# Altium PCB novena_battery_evt1a.PcbDoc (part 1 of 3)
Units mil, origin at the board's own origin, x right, y up, seen from the top; angles counter-clockwise.
Board outline 4763.78 x 1614.17 mil, 4 copper layers (Top Layer, Internal Plane 1, Internal Plane 2, Bottom Layer), stack 65.8 mil thick; 204 components, 130 nets, 1424 pads, 318 vias.
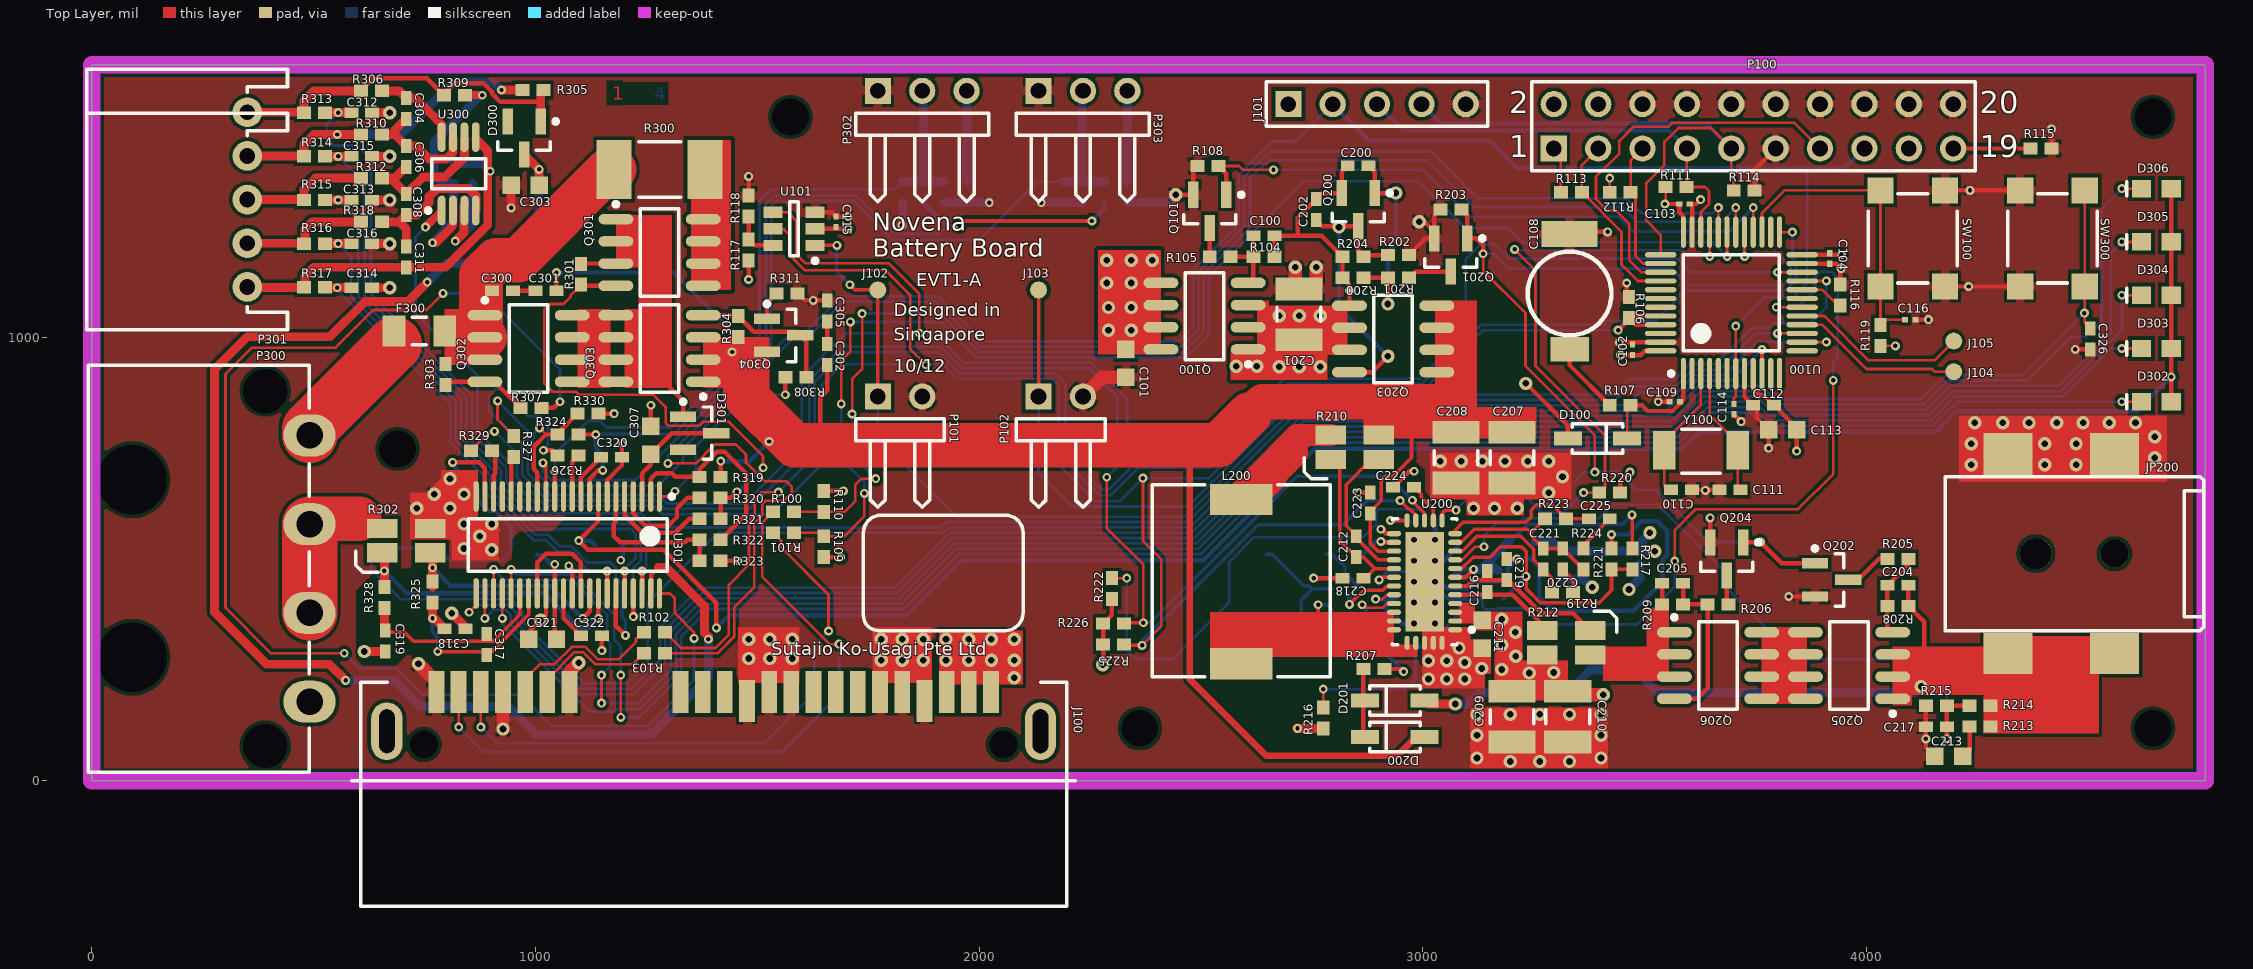
[diagram p0: Top Layer view]
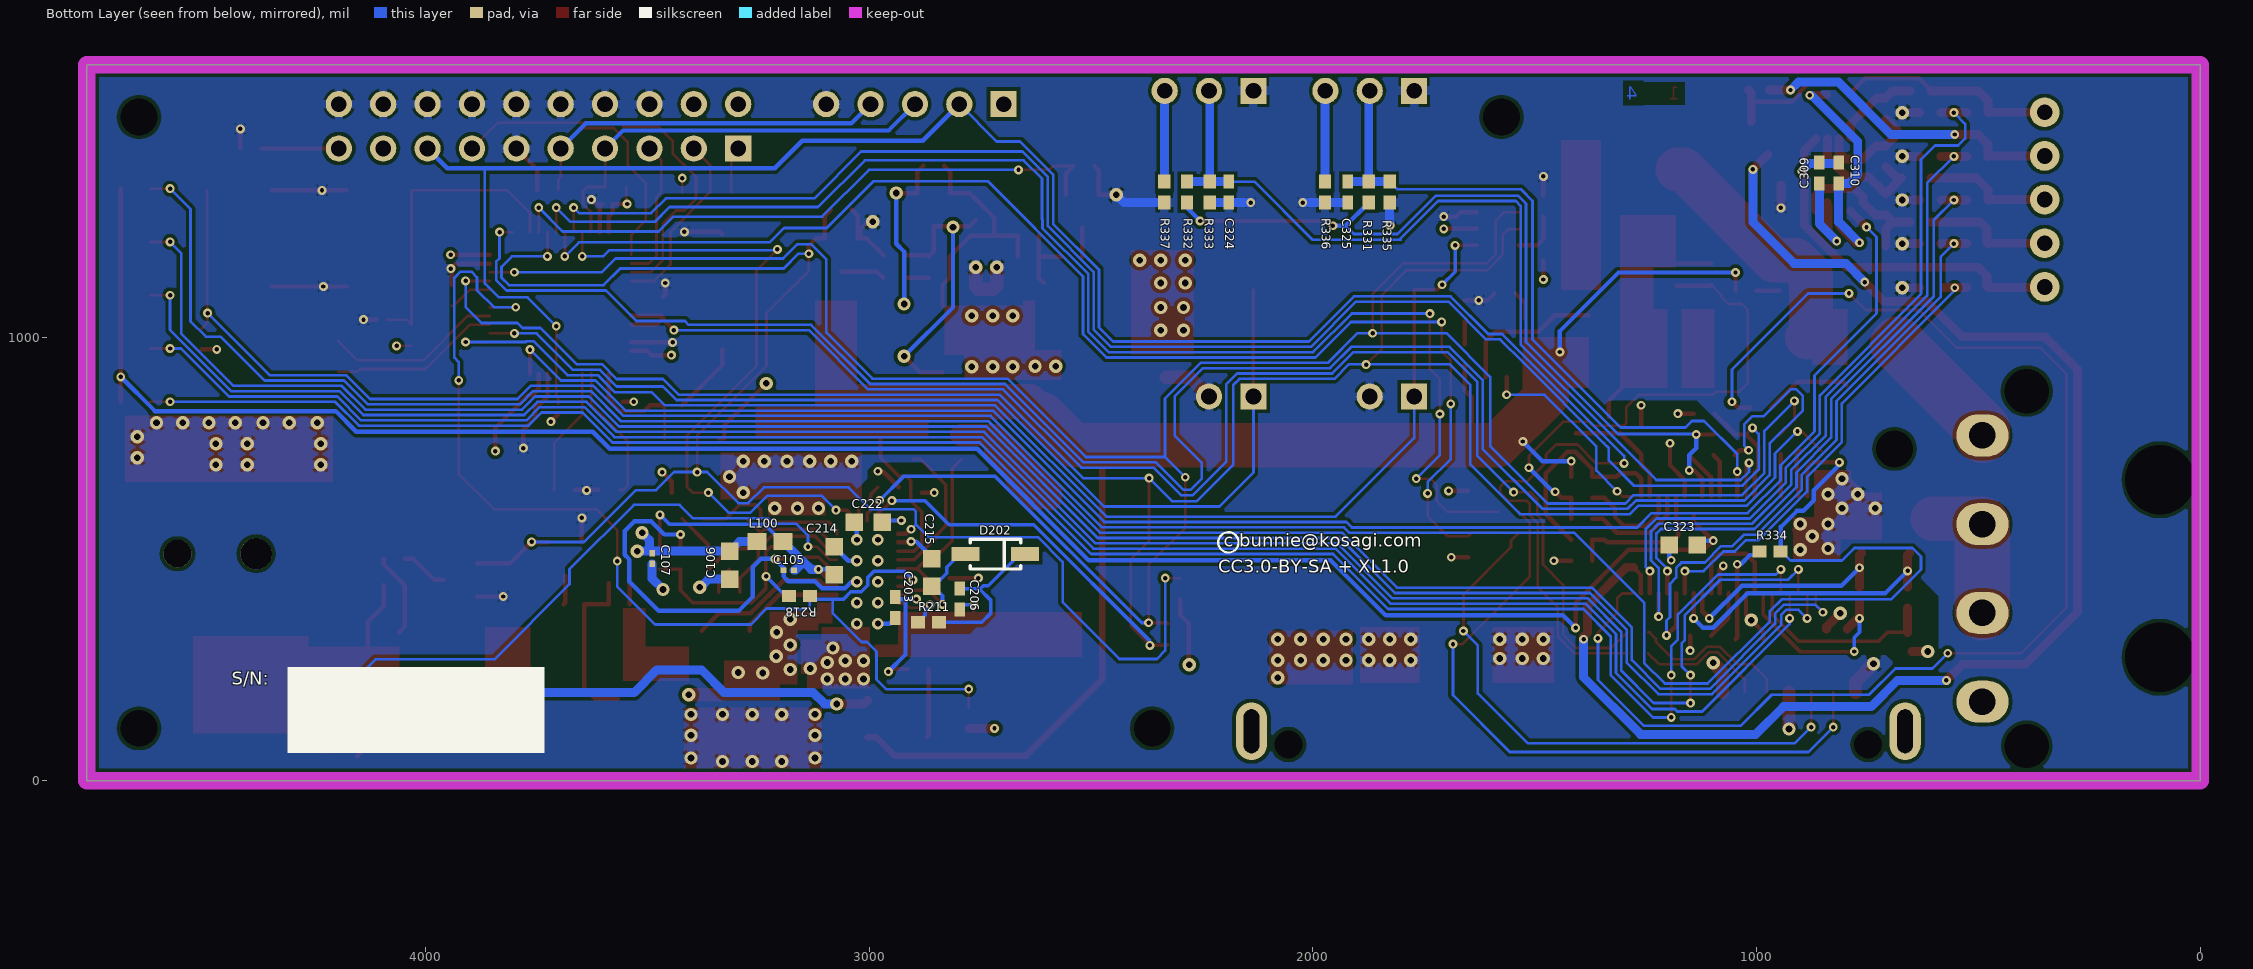
[diagram p1: Bottom Layer view, seen from below]
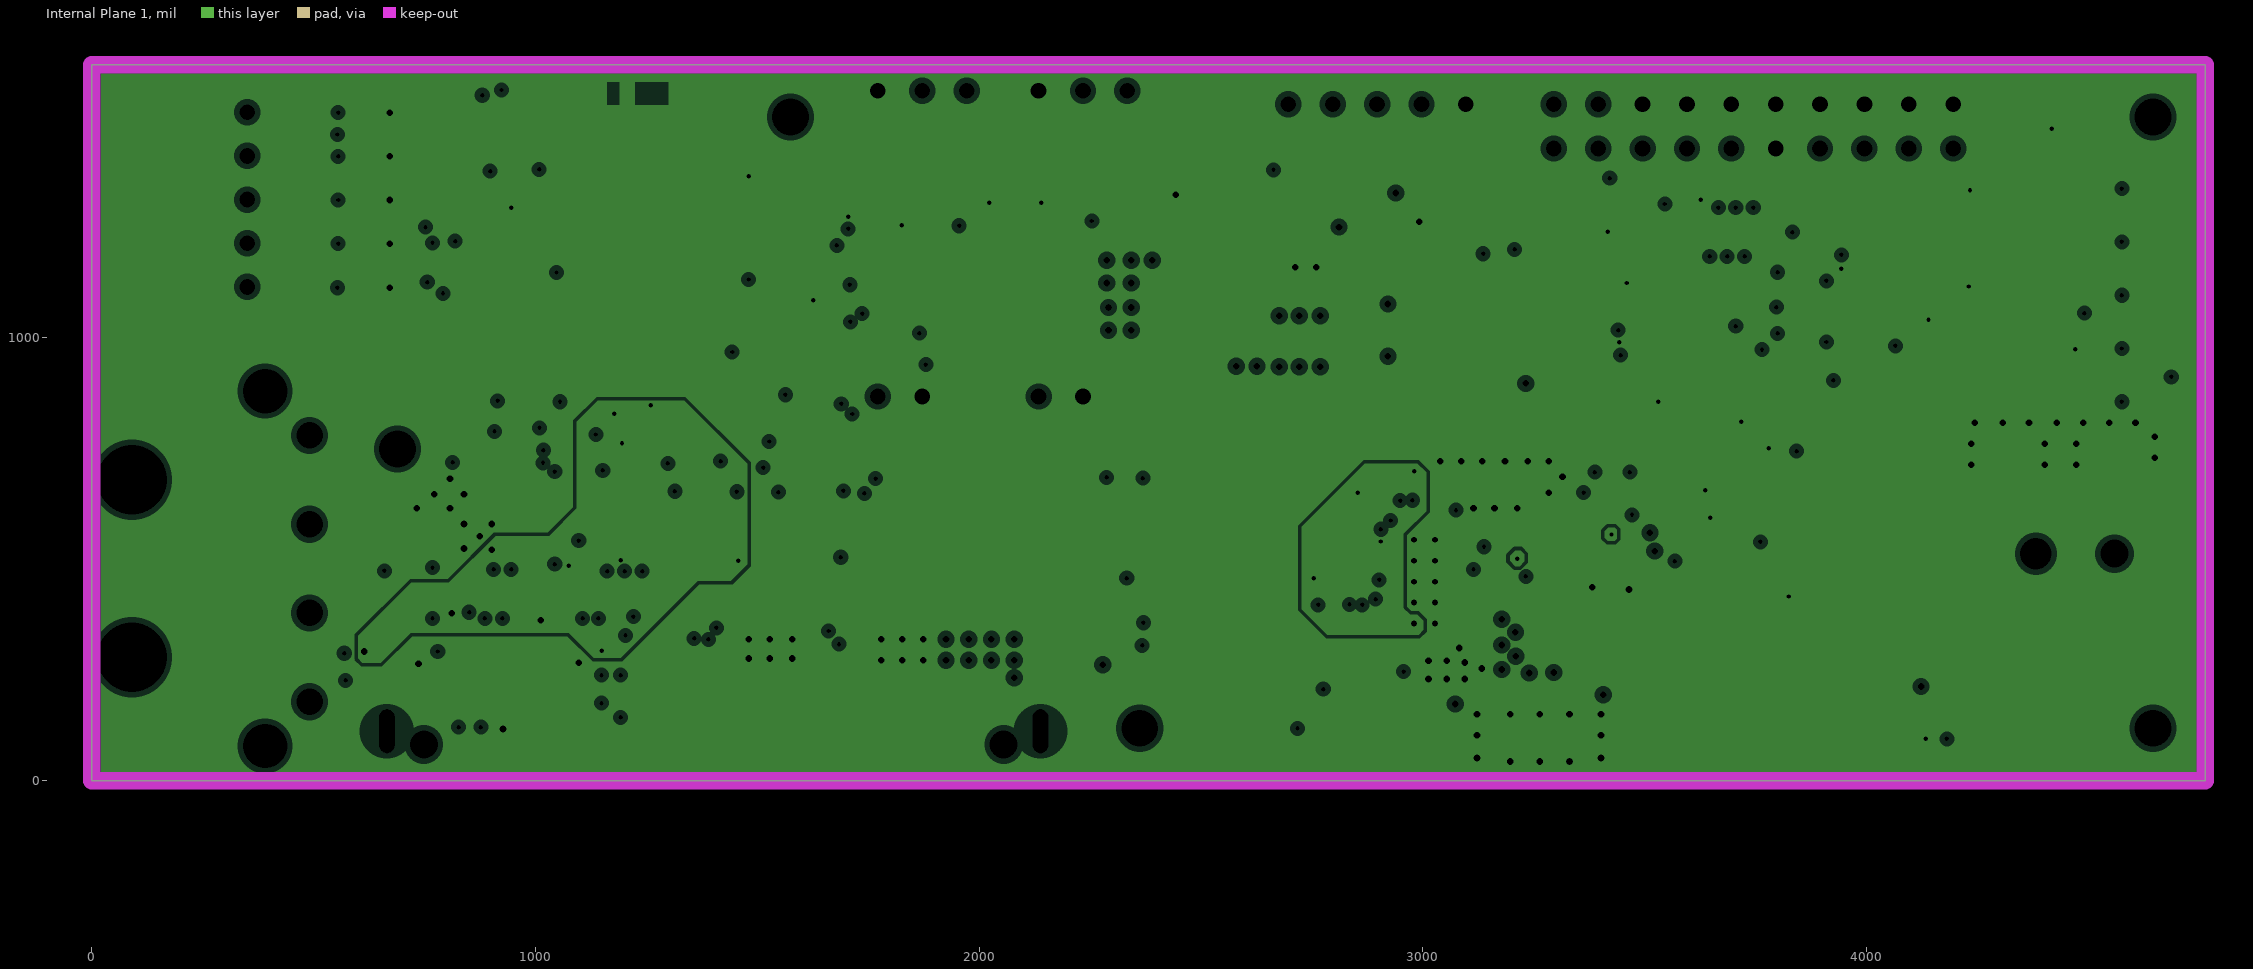
[diagram p2: Internal Plane 1, clearances drawn from the general rule]
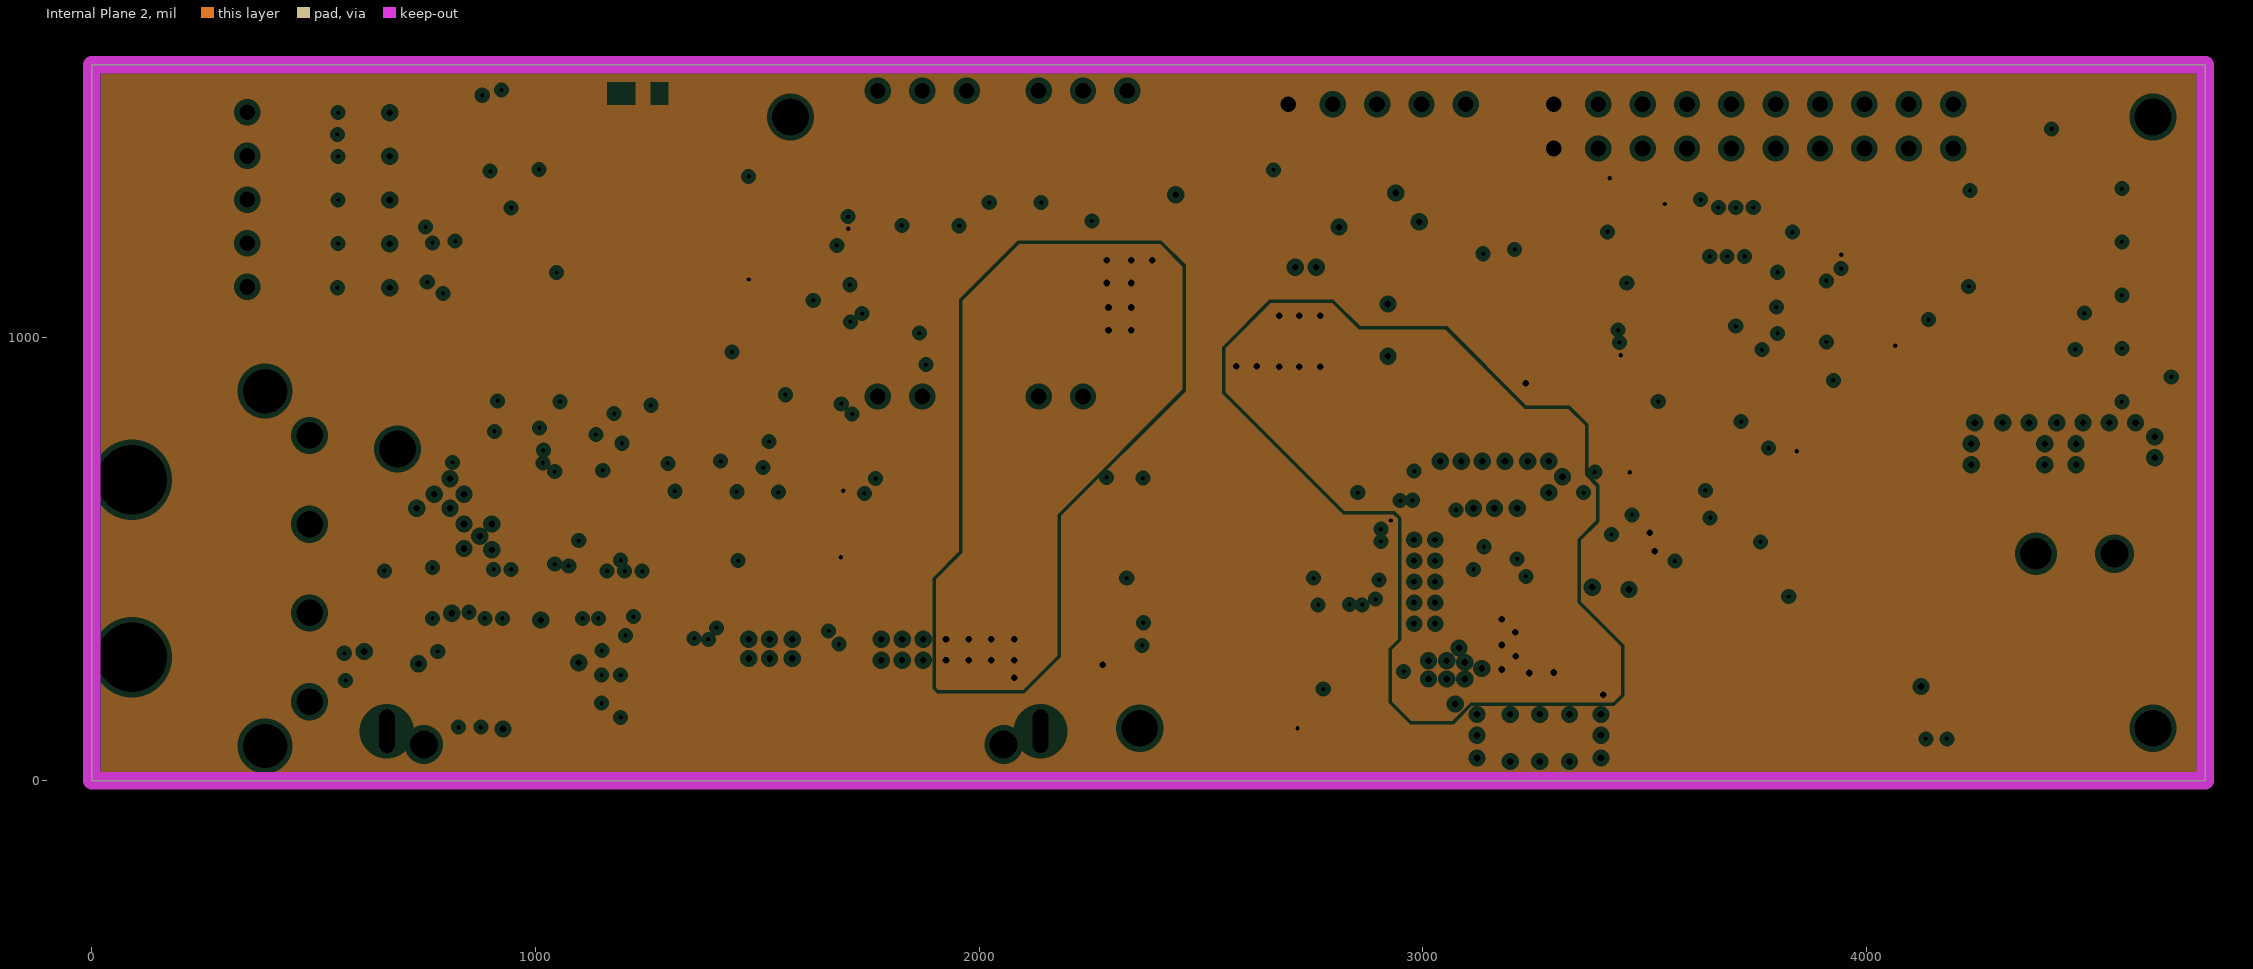
[diagram p3: Internal Plane 2, clearances drawn from the general rule]

## Layer stack, top to bottom
Top Layer: signal copper 1.4
Dielectric: core 12.6, FR-4, Dk 4.8
Internal Plane 1: plane copper 1.4, net GND
Dielectric: prepreg 35, FR-4, Dk 4.8
Internal Plane 2: plane copper 1.4, net P3.3V_UC
Dielectric: core 12.6, FR-4, Dk 4.8
Bottom Layer: signal copper 1.4

## Board outline
0,0 0,1614.17 4763.78,1614.17 4763.78,0

## Design rules (kind name [scope] priority, off if disabled: settings)
Clearance Clearance_poly [InPoly] p1: gap=8
Clearance Clearance_NPTH [PadIsPlated = 'False'] p2: gap=12
Clearance [All] p3: gap=6
ComponentClearance [All] p1 off: gap=10 collisioncheckmode=3 verticalgap=10 showdistances=FALSE
Height [All] p1 off: minheight=0 maxheight=1000 prefheight=500
HoleSize [All] p1: absolutevalues=TRUE maxlimit=175 minlimit=1 maxpercent=80.000 minpercent=20.000
MinimumSolderMaskSliver [All] p1 off: minsoldermaskwidth=10
PlaneClearance [All] p1: clearance=12
PlaneConnect [All] p1: planeconnectstyle=Direct reliefexpansion=20 reliefentries=4 reliefconductorwidth=10 reliefairgap=10
PolygonConnect [All] p1: connectstyle=Relief reliefconductorwidth=20 reliefentries=4 polygonreliefangle="90 Angle" airgapwidth=6
RoomDefinition controller [InComponentClass('controller')] p1 off: confinementstyle=ConfineIn formatcopy=TRUE lockcomponents=FALSE outline -54.49,885.83 -118.11,885.83 -118.11,1215.83 -54.49,1215.83
RoomDefinition charger [InComponentClass('charger')] p2 off: confinementstyle=ConfineIn formatcopy=TRUE lockcomponents=FALSE outline -180.55,78.03 -70.87,78.03 -70.87,748.03 -180.55,748.03
RoomDefinition battery [InComponentClass('battery')] p3 off: confinementstyle=ConfineIn formatcopy=TRUE lockcomponents=FALSE outline -82.68,994.09 -68.9,994.09 -68.9,20.51 -82.68,20.51
RoutingVias [All] p1: holewidth=15 width=30 viastyle="Through Hole" minholewidth=10 minwidth=20 maxholewidth=15 maxwidth=30
SilkToSilkClearance [All] p1 off: silktosilkclearance=10
SilkscreenOverComponentPads [All] p1 off: minsilkscreentomaskgap=10
SolderMaskExpansion [All] p1: expansion=2.76
Width [All] p1: maxlimit=200 minlimit=6 preferedwidth=8 minimp=50.000000 maximp=50.000000 favimp=50.000000
20 further rules are at their usual default settings.

## Classes and differential pairs
component class controller: C100 C101 C102 C103 C104 C105 C106 C107 C108 C109 C110 C111 C112 C113 C114 C115 C116 D100 J100 J101 J102 J103 J104 J105 L100 N100 P100 P101 P102 Q100 Q101 R100 R101 R102 R103 R104 R105 R106 R107 R108 R109 R110 R111 R112 R113 R114 R115 R116 R117 R118 R119 SW100 U100 U101 Y100
component class charger: C200 C201 C202 C203 C204 C205 C206 C207 C208 C209 C210 C211 C212 C213 C214 C215 C216 C217 C218 C219 C220 C221 C222 C223 C224 C225 D200 D201 D202 JP200 L200 Q200 Q201 Q202 Q203 Q204 Q205 Q206 R200 R201 R202 R203 R204 R205 R206 R207 R208 R209 R210 R211 R212 R213 R214 R215 R216 R217 R218 R219 R220 R221 R222 R223 R224 R225 R226 U200
component class battery: C300 C301 C302 C303 C304 C305 C306 C307 C308 C309 C310 C311 C312 C313 C314 C315 C316 C317 C318 C319 C320 C321 C322 C323 C324 C325 C326 D300 D301 D302 D303 D304 D305 D306 F300 P300 P301 P302 P303 Q301 Q302 Q303 Q304 R300 R301 R302 R303 R304 R305 R306 R307 R308 R309 R310 R311 R312 R313 R314 R315 R316 R317 R318 R319 R320 R321 R322 R323 R324 R325 R326 R327 R328 R329 R330 R331 R332 R333 R334 R335 R336 R337 SW300 U300 U301

## Components (designator, comment, footprint, x,y, rotation, side; value= is the part's Value field where it differs from the comment)
C100 "10nF, X7R, 50V 10%" CAPC1005N 2641.73,1228.35 r180 top
C101 "2.2uF, 25V, 10% X5R" CAPC1608N 2330.71,940.94 r270 top
C102 "0.1uF, 6.3V, X5R" CAPC0603N_B 3472.82,971.52 r90 top
C103 "0.1uF, 6.3V, X5R" CAPC0603N_B 3589.75,1300.02 r0 top
C104 "0.1uF, 6.3V, X5R" CAPC0603N_B 3917.32,1177.17 r270 top
C105 "0.1uF, 6.3V, X5R" CAPC0603N_B 3181.1,474.41 r0 bottom
C106 "10uF, 10V, X5R, 20%" CAPC1608N 3313.98,486.22 r270 bottom
C107 "0.1uF, 6.3V, X5R" CAPC0603N_B 3489.17,500.98 r270 bottom
C108 "0.06F 3.3V coin supercap" TAIYO_YUDEN_PAS414HR-VA5R 3330.71,1098.43 r90 top
C109 "0.1uF, 6.3V, X5R" CAPC0603N_B 3567.47,854.6 r180 top
C110 "6.8pF, NP0" CAPC1005N 3582.68,655.51 r0 top
C111 "6.8pF, NP0" CAPC1005N 3691.93,655.51 r180 top
C112 "10nF, X7R, 50V 10%" CAPC1005N 3767.72,846.46 r0 top
C113 "1.0uF, 25V, 20% X5R" CAPC1608N 3811.02,791.34 r0 top
C114 "0.1uF, 6.3V, X5R" CAPC0603N_B 3701.1,837.89 r270 top
C115 "0.1uF, 6.3V, X5R" CAPC0603N_B 1677.17,1259.84 r90 top
C116 "0.1uF, 6.3V, X5R" CAPC0603N_B 4098.43,1039.37 r180 top
C200 "DNP" CAPC1005N 2854.33,1385.83 r180 top
C201 "22uF, 25V, X5R, 10%" CAPC3225N 2720.47,1051.18 r90 top
C202 "0.1uF, 25V, X5R" CAPC1005N 2759.84,1287.4 r270 top
C203 "0.1uF, 25V, X5R" CAPC1005N 2940.94,390.75 r270 bottom
C204 "0.1uF, 25V, X5R" CAPC1005N 4070.87,440.94 r0 top
C205 "10nF, X7R, 50V 10%" CAPC1005N 3562.99,444.88 r180 top
C206 "0.1uF, 25V, X5R" CAPC1005N 2795.28,409.45 r270 bottom
C207 "22uF, 25V, X5R, 10%" CAPC3225N 3200.79,728.35 r270 top
C208 "22uF, 25V, X5R, 10% (DNP)" CAPC3225N 3074.8,728.35 r270 top
C209 "22uF, 25V, X5R, 10%" CAPC3225N 3200.79,144.69 r270 top
C210 "22uF, 25V, X5R, 10% (DNP)" CAPC3225N 3326.77,144.69 r270 top
C211 "1.0uF, 25V, 20% X5R" CAPC1608N 3133.86,330.71 r270 top
C212 "0.1uF, 25V, X5R" CAPC1005N 2850.39,527.56 r270 top
C213 "2.2uF, 25V, 10% X5R" CAPC1608N 4185.04,55.12 r180 top
C214 "1.0uF, 25V, 20% X5R" CAPC1608N 3078.74,496.06 r90 bottom
C215 "1.0uF, 25V, 20% X5R" CAPC1608N 2859.25,469.49 r90 bottom
C216 "0.1uF, 25V, X5R" CAPC1005N 3145.67,448.82 r270 top
C217 "10nF, X7R, 50V 10%" CAPC1005N 4157.48,122.05 r180 top
C218 "0.1uF, 25V, X5R" CAPC1005N 2842.52,456.69 r0 top
C219 "0.1uF, 25V, X5R" CAPC1005N 3188.98,476.38 r90 top
C220 "2.2nF, X7R, 10%" CAPC1005N 3314.96,500 r90 top
C221 "51pF, NP0" CAPC1005N 3271.65,500 r90 top
C222 "1.0uF, 25V, 20% X5R" CAPC1608N 3001.97,582.68 r0 bottom
C223 "0.1uF, 25V, X5R" CAPC1005N 2881.89,625.98 r270 top
C224 "100pF, NP0" CAPC1005N 2956.69,661.42 r180 top
C225 "130pF, NP0" CAPC1005N 3397.64,590.55 r180 top
C300 "0.1uF, 25V, X5R" CAPC1005N 925.2,1104.33 r180 top
C301 "0.1uF, 25V, X5R" CAPC1005N 1023.62,1104.33 r180 top
C302 "0.1uF, 25V, X5R" CAPC1005N 1657.48,960.63 r270 top
C303 "1.0uF, 25V, 20% X5R" CAPC1608N 976.38,1342.52 r180 top
C304 "0.1uF, 25V, X5R" CAPC1005N 708.66,1515.75 r270 top
C305 "0.1uF, 25V, X5R" CAPC1005N 1657.48,1059.06 r270 top
C306 "0.1uF, 25V, X5R" CAPC1005N 708.66,1407.48 r270 top
C307 "1.0uF, 25V, 20% X5R" CAPC1608N 1259.84,767.72 r90 top
C308 "0.1uF, 25V, X5R" CAPC1005N 708.66,1299.21 r270 top
C309 "0.22uF, 25V, X5R" CAPC1005N 858.27,1370.08 r90 bottom
C310 "0.1uF, 25V, X5R" CAPC1005N 814.96,1370.08 r90 bottom
C311 "0.1uF, 25V, X5R" CAPC1005N 708.66,1181.1 r270 top
C312 "0.1uF, 25V, X5R" CAPC1005N 608.27,1505.91 r0 top
C313 "0.1uF, 25V, X5R" CAPC1005N 608.27,1309.06 r0 top
C314 "0.1uF, 25V, X5R" CAPC1005N 608.27,1111.22 r0 top
C315 "0.1uF, 25V, X5R" CAPC1005N 608.27,1407.48 r0 top
C316 "0.1uF, 25V, X5R" CAPC1005N 608.27,1210.63 r0 top
C317 "0.1uF, 25V, X5R" CAPC1005N 889.76,307.09 r90 top
C318 "0.1uF, 25V, X5R" CAPC1005N 818.9,342.52 r0 top
C319 "0.1uF, 25V, X5R" CAPC1005N 661.42,314.96 r270 top
C320 "0.1uF, 25V, X5R" CAPC1005N 1171.26,729.33 r0 top
C321 "1.0uF, 25V, 20% X5R" CAPC1608N 1015.75,318.9 r180 top
C322 "0.1uF, 25V, X5R" CAPC1005N 1125.98,326.77 r0 top
C323 "10uF, 10V, X5R, 20%" CAPC1608N 1165.35,531.5 r0 bottom
C324 "0.47uF, 16V, X5R" CAPC1005N 2188.98,1326.77 r270 bottom
C325 "0.47uF, 16V, X5R" CAPC1005N 1921.26,1326.77 r270 bottom
C326 "0.1uF, 25V, X5R" CAPC1005N 4503.94,996.06 r270 top
D100 "BAT54T1G" SOD123 3393.7,771.65 r0 top
D200 "BAT54T1G" SOD123 2937.01,98.43 r180 top
D201 "BAT54T1G" SOD123 2937.01,181.1 r180 top
D202 "BAT54T1G" SOD123 2715.55,510.83 r180 bottom
D300 "BAS16" SOT23-3N 974.41,1448.82 r270 top
D301 "BAS16" SOT23-3N 1370.08,783.46 r0 top
D302 "APT1608SGC green" CD1608-0603 4653.54,854.33 r180 top
D303 "APT1608SGC green" CD1608-0603 4653.54,974.41 r180 top
D304 "APT1608SGC green" CD1608-0603 4653.54,1094.49 r180 top
D305 "APT1608SGC green" CD1608-0603 4653.54,1214.57 r180 top
D306 "APT1608SGC green" CD1608-0603 4653.54,1334.65 r180 top
F300 "Littlefuse 0437007.WR 7A 35V Fast Blow" RESC3216N 738.19,1013.78 r0 top
J100 "MOLEX 47018-2000 female" SATA_MOLEX_47018_2000 1401.57,81.69 r0 top
J101 "Male 2.54mm 5x1 header" HDR1X5 2696.85,1525.2 r0 top
J102 "test point (DNP)" TP_SMT_38mil 1771.65,1106.3 r90 top
J103 "test point (DNP)" TP_SMT_38mil 2133.86,1106.3 r90 top
J104 "test point (DNP)" TP_SMT_38mil 4196.85,922.24 r90 top
J105 "test point (DNP)" TP_SMT_38mil 4196.85,991.14 r90 top
JP200 "2.1mm x 5.5mm DC jack" CUI_PJ_002AH_SMT 4381.89,511.81 r180 top
L100 "BLM18KG121" INDC1608AN 3223.43,539.37 r0 bottom
L200 "3.3uH, MSS1260-332NL" COILCRAFT_MSS1048 2590.55,263.78 r0 top
P100 "Male 2.54mm 10x2 header" HDR2X10 3295.28,1425.2 r0 top
P101 "Male 2.54mm 2x1 right angle header" HDR1X2H 1771.65,866.14 r0 top
P102 "Male 2.54mm 2x1 right angle header" HDR1X2H 2133.86,866.14 r0 top
P300 "Molex 15-24-4441" MOLEX_15-24-4441 90.55,478.35 r90 top
P301 "JST S4B-XH-A" JST_S5B-XH-A_OPT4 350.39,1359.25 r90 top
P302 "Male 2.54mm 3x1 right angle header" HDR1X3H 1771.65,1555.12 r0 top
P303 "Male 2.54mm 3x1 right angle header" HDR1X3H 2133.86,1555.12 r0 top
Q100 "Si4435DY" SOIC127P600-8AN 2507.87,1047.24 r180 top
Q101 "BSS138" SOT23-3N 2519.69,1283.46 r270 top
Q200 "FDN304P" SOT23-3N 2854.33,1287.4 r270 top
Q201 "BSS138" SOT23-3N 3062.99,1185.04 r270 top
Q202 "BSS138" SOT23-3N 3921.26,452.76 r0 top
Q203 "Si4435DY" SOIC127P600-8AN 2933.07,996.06 r0 top
Q204 "BSS138" SOT23-3N 3685.04,500 r270 top
Q205 "Si4435DY" SOIC127P600-8AN 3960.63,259.84 r180 top
Q206 "Si4435DY" SOIC127P600-8AN 3665.35,259.84 r0 top
Q301 "Si4435DY" SOIC127P600-8AN 1279.53,1190.94 r0 top
Q302 "FDS6690A" SOIC127P600-8AN 984.25,974.41 r0 top
Q303 "FDS6690A" SOIC127P600-8AN 1279.53,974.41 r180 top
Q304 "BSS138" SOT23-3N 1559.06,1003.94 r0 top
R100 "330, 1%" RESC1005N 1559.06,606.3 r180 top
R101 "330, 1%" RESC1005N 1559.06,559.06 r180 top
R102 "330, 1%" RESC1005N 1267.72,334.65 r180 top
R103 "330, 1%" RESC1005N 1267.72,287.4 r180 top
R104 "10k, 1%" RESC1005N 2641.73,1181.1 r0 top
R105 "10k, 1%" RESC1005N 2543.31,1181.1 r0 top
R106 "47k, 1%" RESC1005N 3464.57,1066.93 r270 top
R107 "1k, 1%" RESC1005N 3444.88,846.46 r0 top
R108 "100k, 1%" RESC1005N 2515.75,1385.83 r0 top
R109 "47k, 1%" RESC1005N 1649.61,527.56 r270 top
R110 "47k, 1%" RESC1005N 1649.61,629.92 r90 top
R111 "10k, 1%" RESC1005N 3570.87,1338.58 r180 top
R112 "10k, 1%" RESC1005N 3444.88,1326.77 r180 top
R113 "10k, 1%" RESC1005N 3334.65,1326.77 r180 top
R114 "10k, 1%" RESC1005N 3724.41,1330.71 r180 top
R115 "10k, 1%" RESC1005N 4393.7,1425.2 r180 top
R116 "10k, 1%" RESC1005N 3940.94,1094.49 r270 top
R117 "10k, 1% (DNP)" RESC1005N 1480.32,1196.85 r90 top
R118 "10k, 1%" RESC1005N 1480.32,1295.28 r90 top
R119 "47k, 1%" RESC1005N 4031.5,1003.94 r270 top
R200 "10k, 1%" RESC1005N 2842.52,1133.86 r0 top
R201 "20k, 1%" RESC1005N 2944.88,1133.86 r0 top
R202 "100k, 1%" RESC1005N 2944.88,1185.04 r0 top
R203 "1M, 1%" RESC1005N 3062.99,1287.4 r0 top
R204 "100k, 1%" RESC1005N 2842.52,1181.1 r0 top
R205 "10k, 1%" RESC1005N 4070.87,500 r180 top
R206 "10k, 1%" RESC1005N 3665.35,397.64 r180 top
R207 "10 ohm, 1%" RESC1005N 2889.76,251.97 r0 top
R208 "10k, 1%" RESC1005N 4070.87,393.7 r180 top
R209 "10k, 1%" RESC1005N 3562.99,397.64 r0 top
R210 "0.010 ohm, 1% kelvin, 50ppm" OHMITE_LVK_1206_KELVIN 2846.46,751.97 r0 top
R211 "3.9 ohm, 5%" RESC1005N 2866.14,357.28 r180 bottom
R212 "0.010 ohm, 1% kelvin, 50ppm" OHMITE_LVK_1206_KELVIN 3322.83,311.02 r180 top
R213 "3.9 ohm, 5%" RESC1005N 4255.91,122.05 r180 top
R214 "430k, 1%" RESC1005N 4255.91,169.29 r180 top
R215 "66.5k, 1%" RESC1005N 4157.48,169.29 r180 top
R216 "10k, 1%" RESC1005N 2775.59,141.73 r90 top
R217 "200k, 1%" RESC1005N 3472.44,500 r270 top
R218 "1.4M, 1%" RESC1005N 3157.48,416.34 r180 bottom
R219 "7.5k, 1%" RESC1005N 3314.96,425.2 r180 top
R220 "10k, 1%" RESC1005N 3421.26,649.61 r180 top
R221 "49.9k, 1%" RESC1005N 3425.2,500 r90 top
R222 "10k, 1%" RESC1005N 2299.21,433.07 r90 top
R223 "200k, 1%" RESC1005N 3299.21,590.55 r0 top
R224 "20k, 1%" RESC1005N 3362.2,500 r90 top
R225 "10k, 1%" RESC1005N 2303.15,307.09 r0 top
R226 "10k, 1%" RESC1005N 2303.15,354.33 r0 top
R300 "300, 5%, 1W" RESC6432N 1279.53,1377.95 r180 top
R301 "1M, 1%" RESC1005N 1102.36,1141.73 r90 top
R302 "0.010 ohm, 1% kelvin, 50ppm" OHMITE_LVK_1206_KELVIN 708.66,541.34 r0 top
R303 "3.01M, 1%" RESC1005N 797.24,915.35 r270 top
R304 "3.01M, 1%" RESC1005N 1456.69,1023.62 r270 top
R305 "0 ohm" RESC1005N 994.09,1557.09 r0 top
R306 "1k, 1%" RESC1005N 629.92,1555.12 r0 top
R307 "5.1k, 1%" RESC1005N 990.16,840.55 r0 top
R308 "5.1k, 1%" RESC1005N 1586.61,909.45 r180 top
R309 "1k, 1%" RESC1005N 816.93,1545.28 r0 top
R310 "1k, 1%" RESC1005N 629.92,1456.69 r0 top
R311 "1M, 1%" RESC1005N 1566.93,1098.43 r0 top
R312 "1k, 1%" RESC1005N 629.92,1358.27 r0 top
R313 "100, 1%" RESC1005N 501.97,1505.91 r0 top
R314 "100, 1%" RESC1005N 501.97,1407.48 r0 top
R315 "100, 1%" RESC1005N 501.97,1309.06 r0 top
R316 "100, 1%" RESC1005N 501.97,1210.63 r0 top
R317 "100, 1%" RESC1005N 501.97,1112.2 r0 top
R318 "1k, 1%" RESC1005N 629.92,1259.84 r0 top
R319 "1k, 1%" RESC1005N 1393.7,685.04 r180 top
R320 "5.1k, 1%" RESC1005N 1393.7,637.8 r180 top
R321 "5.1k, 1% (DNP)" RESC1005N 1393.7,590.55 r180 top
R322 "100k, 1% (DNP)" RESC1005N 1393.7,543.31 r0 top
R323 "100k, 1%" RESC1005N 1393.7,496.06 r0 top
R324 "100k, 1%" RESC1005N 1072.83,780.51 r180 top
R325 "100, 1%" RESC1005N 767.72,425.2 r90 top
R326 "0 ohm" RESC1005N 1072.83,733.27 r180 top
R327 "0 ohm" RESC1005N 950.79,753.94 r90 top
R328 "100, 1%" RESC1005N 659.45,413.39 r90 top
R329 "0 ohm" RESC1005N 877.95,744.09 r180 top
R330 "1k, 1%" RESC1005N 1118.11,827.76 r0 top
R331 "8.45k, 1%" RESC1005N 1874.02,1326.77 r270 bottom
R332 "8.45k, 1%" RESC1005N 2283.46,1326.77 r270 bottom
R333 "61.9k, 1%" RESC1005N 2232.28,1326.77 r90 bottom
R334 "100k, 1%" RESC1005N 969.49,516.73 r0 bottom
R335 "61.9k, 1%" RESC1005N 1826.77,1326.77 r90 bottom
R336 "10k, 1%" RESC1005N 1972.44,1326.77 r90 bottom
R337 "10k, 1%" RESC1005N 2334.65,1326.77 r90 bottom
SW100 "TS-1187A, Chi Fung" SWITCH_TS-1187A 4031.5,1330.71 r0 top
SW300 "TS-1187A, Chi Fung" SWITCH_TS-1187A 4346.46,1330.71 r0 top
U100 "STM32F101C8T6" TSQFP50P900X900-48N 3695.53,1077.31 r90 top
U101 "DAC081C081CIMK" SOT26A-6N 1582.68,1244.09 r180 top
U200 "BQ24765RUV" TI_R-PVQFN-N34 3003.94,448.82 r180 top
U300 "BQ29412DCT" TSOP65P490-8AN 826.77,1368.11 r90 top
U301 "BQ20Z95DBT" TSSOP50P640-44N 1072.83,531.5 r270 top
Y100 "Abracon ABS10-32.768KHZ-7-T  7pF CL" ABS10-32.768KHZ 3709.57,744.67 r180 top

## Footprints (in the part's own frame and the unit in brackets; to place one, negate y for a bottom-side part, rotate by r counter-clockwise, add the part's x,y. Pads: shape width x height; smd on the part's side, far side on the other; paste and mask are expansions set on the pad)
ABS10-32.768KHZ [mm] "Abracon 32.768 kHz 4.9mm x 1.8mm x 1.0mm crystal"
  rect 1.3x2.2 smd mask+0.07: 1(0,0) 2(4.2,0)
  silkscreen extent 1,-1.2 3.2,1.3, body extent -0.6,-1.1 4.8,1.1, height 1
CAPC0603N_B [mm] "Chip Capacitor, 2-Leads, Body 0.6x0.3mm, IPC Medium Density"
  rect 0.35x0.3 smd mask+0.07: 1(-0.3,0) 2(0.3,0)
  body extent -0.32,-0.16 0.31,0.17, height 0.33
CAPC1005N [mm] "Chip Capacitor, Body 1.0x0.5mm, IPC Medium Density"
  rect 0.8x0.6 smd: 1(-0.6,0) 2(0.6,0)
  body extent -0.55,-0.3 0.55,0.3, height 0.6
CAPC1608N [mm] "Chip Capacitor, Body 1.6x0.8mm, IPC Medium Density"
  rect 1x1 smd: 1(-0.8,0) 2(0.8,0)
  body extent -0.88,-0.48 0.87,0.48, height 0.85
CAPC3225N [mm] "Chip Capacitor, Body 3.2x2.5mm, IPC Medium Density"
  rect 1.3x2.7 smd: 1(-1.45,0) 2(1.45,0)
  silkscreen extent -0.4,-1.25 0.4,1.25, body extent -1.7,-1.35 1.7,1.35, height 1.35
CD1608-0603 [mm] "Chip Diode; Body 1.6 x 0.8 mm (LxW typ)"
  rect 1.1x1 smd: 1(-0.85,0) 2(0.85,0)
  silkscreen extent 1.7,-0.4 1.7,0.4
COILCRAFT_MSS1048 [mm] "Coilcraft shielded power inductor"
  rect 3.56x1.78 smd mask+0.075: 1(0,0) 2(0,9.4)
  silkscreen extent -5.1,-0.75 5.1,10.25, body extent -5.1,-0.37 5.1,9.93, height 5.05
CUI_PJ_002AH_SMT [mm] "SMT 2.1mmx5.5mm ID (P-5) connector"
  round 1.6 hole 1.6 unplated: 0(-4.5,0)
  round 1.8 hole 1.8 unplated: 0(0,0)
  rect 2.8x2.4 smd: 1(-4.5,5.7) 1(1.6,5.7) 2(-4.5,-5.7) 3(1.6,-5.7)
  silkscreen extent -9.6,-4.4 5.2,4.4, body extent -9.5,-6.3 5.3,6.3, height 11.19
HDR1X2H [mm] "Connector; Header; 2 Position; Right Angle"
  rect 1.5x1.5 hole 0.9: 1(0,0)
  round 1.5 hole 0.9: 2(2.54,0)
  silkscreen extent -1.27,-6.35 3.81,-1.27
HDR1X3H [mm] "Connector; Header; 3 Position; Right Angle"
  rect 1.5x1.5 hole 0.9: 1(0,0)
  round 1.5 hole 0.9: 2(2.54,0) 3(5.08,0)
  silkscreen extent -1.27,-6.35 6.35,-1.27
HDR1X5 [mm] "Connector; Header; 5 Position"
  rect 1.5x1.5 hole 0.9: 1(0,0)
  round 1.5 hole 0.9: 2(2.54,0) 3(5.08,0) 4(7.62,0) 5(10.16,0)
  silkscreen extent -1.27,-1.27 11.43,1.27
HDR2X10 [mm] "Connector; Header; 10x2 Position"
  rect 1.5x1.5 hole 0.9: 1(0,0)
  round 1.5 hole 0.9: 2(0,2.54) 3(2.54,0) 4(2.54,2.54) 5(5.08,0) 6(5.08,2.54) 7(7.62,0) 8(7.62,2.54) 9(10.16,0) 10(10.16,2.54) 11(12.7,0) 12(12.7,2.54) 13(15.24,0) 14(15.24,2.54) 15(17.78,0) 16(17.78,2.54) 17(20.32,0) 18(20.32,2.54) 19(22.86,0) 20(22.86,2.54)
  silkscreen extent -1.27,-1.27 24.13,3.81
INDC1608AN [mm] "Chip Inductor, Body 1.6x0.8mm, IPC Medium Density"
  rect 1.1x1 smd: 1(-0.75,0) 2(0.75,0)
  body extent -0.9,-0.5 0.9,0.5, height 1
JST_S5B-XH-A_OPT4 [mm] "JST 5-pin 2.5mm RA male connector with 4-pin stuff option"
  round 1.7 hole 0.9 mask+0.07: 1(3.75,0) 2(1.25,0) 3(-1.25,0) 4(-3.75,0) 5(-6.25,0)
  silkscreen extent -8.7,-2.3 6.2,9.2, body extent -8.7,-2.3 6.2,9.2, height 6.1
MOLEX_15-24-4441 [mm] "4-pin classic PC disk drive power connector, RA"
  round 2.4 hole 2.54 unplated mask+0.07: 0(-10.16,-7.62) 0(10.16,-7.62)
  round 2.4 hole 3.99 unplated mask+0.07: 0(-5.08,0) 0(5.08,0)
  oval 2.4x3 hole 1.52 mask+0.07: 1(7.62,-10.16) 2(2.54,-10.16) 3(-2.54,-10.16) 4(-7.62,-10.16)
  silkscreen extent -11.65,-10.15 11.65,2.5, body extent -11.62,-10.88 11.65,2.78, height 8.79
OHMITE_LVK_1206_KELVIN [mm] "4-terminal kelvin sense resistor, 1206 package"
  rect 1.75x1.1 smd mask+0.07: 1(-1.375,-0.7) 2(-1.375,0.7) 3(1.375,0.7) 4(1.375,-0.7)
  silkscreen extent -2.9,-1.8 -1.6,-0.6, body extent -1.6,-0.8 1.6,0.8, height 0.65
RESC1005N [mm] "Chip Resistor, Body 1.1x0.5mm, IPC Medium Density"
  rect 0.8x0.7 smd: 1(-0.6,0) 2(0.6,0)
  body extent -0.55,-0.3 0.55,0.3, height 0.4
RESC3216N [mm] "Chip Resistor, Body 3.2x1.6mm, IPC Medium Density"
  rect 1.3x1.8 smd: 1(-1.45,0) 2(1.45,0)
  silkscreen extent -0.4,-0.8 0.4,0.8, body extent -1.68,-0.87 1.68,0.87, height 0.71
RESC6432N [mm] "Chip Resistor, Body 6.4x3.2mm, IPC Medium Density"
  rect 2x3.4 smd: 1(-2.6,0) 2(2.6,0)
  silkscreen extent -1.2,-1.6 1.2,1.6, body extent -3.3,-1.7 3.3,1.7, height 1.2
SATA_MOLEX_47018_2000 [mm] "SATA docking connector, top mount type"
  oval 1.8x3.3 hole 0.9 slot 2.5 at 90 deg mask+0.07: 0(-18.71,0.76) 0(18.71,0.76)
  round 1 hole 1.6 unplated mask+0.07: 0(-16.595,0) 0(16.595,0)
  rect 0.9x2.4 smd mask+0.07: 1(15.875,3) 2(14.605,3) 3(13.335,3) 4(12.065,2.5) 5(10.795,3) 6(9.525,3) 7(8.255,3) 8(6.985,3) 9(5.715,3) 10(4.445,3) 11(3.175,3) 12(1.905,2.5) 13(0.635,3) 14(-0.635,3) 15(-1.905,3) 16(-8.255,3) 17(-9.525,3) 18(-10.795,3) 19(-12.065,3) 20(-13.335,3) 21(-14.605,3) 22(-15.875,3)
  silkscreen extent -20.73,-9.25 20.7,3.57, body extent -20.19,-9.28 20.24,3.59, height 4.35
SOD123 [mm] "SOD-123; 2 Leads; Body 2.7 x 1.6 mm, (LxW)"
  rect 1.6x0.8 smd: 1(-1.7,0) 2(1.7,0)
  silkscreen extent -1.45,-0.85 1.45,0.85
SOIC127P600-8AN [mm] "SOIC, 8-Leads, Body 4.9x3.9mm, Pitch 1.27mm, IPC Medium Density"
  oval 2x0.6 smd: 1(-2.5,1.905) 2(-2.5,0.635) 3(-2.5,-0.635) 4(-2.5,-1.905) 5(2.5,-1.905) 6(2.5,-0.635) 7(2.5,0.635) 8(2.5,1.905)
  silkscreen extent -2.63,-2.5 1.1,2.88, body extent -2,-2.5 2,2.5, height 2.72
SOT23-3N [mm] "SOT23, 3-Leads, Body 2.9x1.3mm, Pitch 0.95mm, Lead Span 2.5mm, IPC Medium Density"
  rect 1.5x0.6 smd: 1(-0.95,0.95) 2(-0.95,-0.95) 3(0.95,0)
  silkscreen extent -1.07,-1.5 0.7,1.93, body extent -0.7,-1.5 0.7,1.5, height 1.1
SOT26A-6N [mm] "SOT23, 6-Leads, Body 2.9x1.7mm, Pitch 0.95mm, Lead Span 2.8mm, IPC Medium Density"
  rect 1.1x0.65 smd: 1(-1.2,0.95) 2(-1.2,0) 3(-1.2,-0.95) 4(1.2,-0.95) 5(1.2,0) 6(1.2,0.95)
  silkscreen extent -1.33,-1.55 0.25,1.95, body extent -0.9,-1.55 0.9,1.55, height 1.45
SWITCH_TS-1187A [mm] "TS-1187A tact switch, Chi Fung Electronics"
  rect 1.5x1.5 smd mask+0.07: 1(0,0) 2(0,-5.5) 3(3.7,0) 4(3.7,-5.5)
  silkscreen extent -0.7,-5.3 4.4,-0.2, body extent -0.7,-5.3 4.4,-0.2, height 1.6
TAIYO_YUDEN_PAS414HR-VA5R [mm] "Taiyo Yuden Supercap"
  rect 1.4x2.2 smd: 1(-3.2,0)
  rect 1.5x3.2 smd: 2(3.4,0)
  silkscreen extent -2.4,-2.4 2.4,2.4, body extent -2.36,-2.39 2.42,2.4, height 1.4
TI_R-PVQFN-N34 [mm] "34-pin QFN (from TI datasheet)"
  oval 0.8x0.3 smd mask+0.07: 1(-1.75,2.75) 2(-1.75,2.25) 3(-1.75,1.75) 4(-1.75,1.25) 5(-1.75,0.75) 6(-1.75,0.25) 7(-1.75,-0.25) 8(-1.75,-0.75) 9(-1.75,-1.25) 10(-1.75,-1.75) 11(-1.75,-2.25) 12(-1.75,-2.75) 18(1.75,-2.75) 19(1.75,-2.25) 20(1.75,-1.75) 21(1.75,-1.25) 22(1.75,-0.75) 23(1.75,-0.25) 24(1.75,0.25) 25(1.75,0.75) 26(1.75,1.25) 27(1.75,1.75) 28(1.75,2.25) 29(1.75,2.75)
  oval 0.3x0.8 smd mask+0.07: 13(-1,-3.5) 14(-0.5,-3.5) 15(0,-3.5) 16(0.5,-3.5) 17(1,-3.5) 30(1,3.5) 31(0.5,3.5) 32(0,3.5) 33(-0.5,3.5) 34(-1,3.5)
  rect 2.2x5.7 smd mask+0.07: 35(0,0)
  silkscreen extent -2.83,-3.6 1.85,3.6, body extent -1.83,-3.57 1.83,3.58, height 1
TP_SMT_38mil [mil] "38 mil round test point, SMT"
  round 38 smd: 1(0,0)
TSOP65P490-8AN [mm] "TSOP, 8-Leads, Body 3x3mm, Pitch 0.65mm, IPC Medium Density"
  oval 1.7x0.45 smd: 1(-2.1,0.975) 2(-2.1,0.325) 3(-2.1,-0.325) 4(-2.1,-0.975) 5(2.1,-0.975) 6(2.1,-0.325) 7(2.1,0.325) 8(2.1,0.975)
  silkscreen extent -2.22,-1.55 0.85,1.87, body extent -1.6,-1.6 1.6,1.6, height 1.1
TSQFP50P900X900-48N [mm] "Thin QFP, 48-Leads, Body 7x7mm, Pitch 0.5mm, IPC Medium Density"
  oval 1.8x0.3 smd: 1(-4.05,2.75) 2(-4.05,2.25) 3(-4.05,1.75) 4(-4.05,1.25) 5(-4.05,0.75) 6(-4.05,0.25) 7(-4.05,-0.25) 8(-4.05,-0.75) 9(-4.05,-1.25) 10(-4.05,-1.75) 11(-4.05,-2.25) 12(-4.05,-2.75) 25(4.05,-2.75) 26(4.05,-2.25) 27(4.05,-1.75) 28(4.05,-1.25) 29(4.05,-0.75) 30(4.05,-0.25) 31(4.05,0.25) 32(4.05,0.75) 33(4.05,1.25) 34(4.05,1.75) 35(4.05,2.25) 36(4.05,2.75)
  oval 0.3x1.8 smd: 13(-2.75,-4.05) 14(-2.25,-4.05) 15(-1.75,-4.05) 16(-1.25,-4.05) 17(-0.75,-4.05) 18(-0.25,-4.05) 19(0.25,-4.05) 20(0.75,-4.05) 21(1.25,-4.05) 22(1.75,-4.05) 23(2.25,-4.05) 24(2.75,-4.05) 37(2.75,4.05) 38(2.25,4.05) 39(1.75,4.05) 40(1.25,4.05) 41(0.75,4.05) 42(0.25,4.05) 43(-0.25,4.05) 44(-0.75,4.05) 45(-1.25,4.05) 46(-1.75,4.05) 47(-2.25,4.05) 48(-2.75,4.05)
  silkscreen extent -4.17,-2.75 2.75,3.57, body extent -3.5,-3.5 3.5,3.5, height 1.6
TSSOP50P640-44N [mm] "TSSOP, 44-Leads, Body 11x4.4mm, Pitch 0.5mm, IPC Medium Density"
  oval 1.75x0.3 smd: 1(-2.775,5.25) 2(-2.775,4.75) 3(-2.775,4.25) 4(-2.775,3.75) 5(-2.775,3.25) 6(-2.775,2.75) 7(-2.775,2.25) 8(-2.775,1.75) 9(-2.775,1.25) 10(-2.775,0.75) 11(-2.775,0.25) 12(-2.775,-0.25) 13(-2.775,-0.75) 14(-2.775,-1.25) 15(-2.775,-1.75) 16(-2.775,-2.25) 17(-2.775,-2.75) 18(-2.775,-3.25) 19(-2.775,-3.75) 20(-2.775,-4.25) 21(-2.775,-4.75) 22(-2.775,-5.25) 23(2.775,-5.25) 24(2.775,-4.75) 25(2.775,-4.25) 26(2.775,-3.75) 27(2.775,-3.25) 28(2.775,-2.75) 29(2.775,-2.25) 30(2.775,-1.75) 31(2.775,-1.25) 32(2.775,-0.75) 33(2.775,-0.25) 34(2.775,0.25) 35(2.775,0.75) 36(2.775,1.25) 37(2.775,1.75) 38(2.775,2.25) 39(2.775,2.75) 40(2.775,3.25) 41(2.775,3.75) 42(2.775,4.25) 43(2.775,4.75) 44(2.775,5.25)
  silkscreen extent -2.9,-5.7 1.5,6.08, body extent -2.25,-5.7 2.25,5.7, height 1.2

## Part data
C100 C101 C102 C103 C104 C105 C106 C107 C109 C112 C113 C114 C115 C116 C200 C201 C202 C203 C204 C205 C206 C207 C208 C209 C210 C211 C212 C213 C214 C215 C216 C217 C218 C219 C220 C221 C222 C223 C224 C225 C300 C301 C302 C303 C304 C305 C306 C307 C308 C309 C310 C311 C312 C313 C314 C315 C316 C317 C318 C319 C320 C321 C322 C323 C324 C325 C326: library part "Cap Semi", "Capacitor (Semiconductor SIM Model)"
C108: library part "Cap Pol3", "Taiyo Yuden PAS414HR-VA5R"
C110 C111: library part "CAP NP"
D100 D200 D201 D202: library part "D Schottky", "Schottky Diode"
D300 D301: library part "Diode 1N4148", "Silicon diode"
D302 D303 D304 D305 D306: library part LED2, "Typical RED, GREEN, YELLOW, AMBER GaAs LED"
F300: library part "Fuse Thermal", "Thermal Fuse"
J100: library part SATA_22P_HEADER, "SATA+Power connector"
J101: library part "Header 5", "Header, 5-Pin"
J102 J103 J104 J105: library part CON1, "Connector"
JP200: library part PWR2.5, "Low Voltage Power Supply Connector"
L100 L200: library part "Inductor Iron", "Magnetic-Core Inductor"
P100: library part "Header 10X2", "Header, 10-Pin, Dual row"
P101 P102: library part "Header 2H", "Header, 2-Pin, Right Angle"
P300: library part "Header 4", "Classic PC hard drive power connector, RA"
P301: library part "Header 5", "JST S4B-XH-A 2.5mm RA connector, stuffed in 5-pin slot, high pin aligned"
P302 P303: library part "Header 3H", "Header, 3-Pin, Right Angle"
Q100 Q203 Q205 Q206 Q301: "Singre P-channel FET, 8A, 30V"
Q101 Q201 Q202 Q204 Q304: library part MOSFET-N, "N-Channel MOSFET"
Q200: library part MOSFET-P, "P-Channel MOSFET"
Q302 Q303: "Single N-channel FET, 11A, 30V"
R100 R101 R102 R103 R104 R105 R106 R107 R108 R109 R110 R111 R112 R113 R114 R115 R116 R117 R118 R119 R200 R201 R202 R203 R204 R205 R206 R207 R208 R209 R211 R213 R214 R215 R216 R217 R218 R219 R220 R221 R222 R223 R224 R225 R226 R300 R301 R303 R304 R305 R306 R307 R308 R309 R310 R311 R312 R313 R314 R315 R316 R317 R318 R319 R320 R321 R322 R323 R324 R325 R326 R327 R328 R329 R330 R331 R332 R333 R334 R335 R336 R337: library part Res1, "Resistor"
R210 R212 R302: library part RES_4TERM
SW100 SW300: library part "Header 4", "Chi Fung TS-1187A"
U100: library part STM32F103C8T6, "32-bit ARM Coretex high performance microcontroller"
U101: library part DAC081C81CIMK, "Single 8-bit DAC for I2C bus"
U200: "SMBus-controlled battery charger with integrated FETs"
U300: library part BQ2941XDCT, "Voltage protection for 2-,3-, and 4-cell LiIon batteries (2nd level)"
U301: "SBS 1.1-Compliant Gas Gauge and Protection with Impedance Track (TM)"
Y100: library part XTAL, "Crystal Oscillator"

## Free pads (board coordinates)
  round 78.74 hole 82.68 unplated mask+59.06: 0(688.98,748.03) 0(1574.8,1496.06) 0(2362.2,118.11) 0(4645.67,1496.06) 2(4645.67,118.11)
  rect 8x2 on Top Overlay: 1(1764.87,397.67) 1(1802.87,461.67) 1(1804.87,555.67) 1(1808.87,561.67) 1(1820.87,529.67) 1(1826.87,357.67) 1(1852.87,517.67) 1(1858.87,459.67) 1(1858.87,549.67) 1(1862.87,555.67) 1(1864.87,557.67) 1(1866.87,561.67) 1(1868.87,563.67) 1(1870.87,569.67) 1(1872.87,531.67) 1(1872.87,571.67) 1(1874.87,533.67) 1(1876.87,535.67) 1(1878.87,537.67) 1(1888.87,551.67) 1(1888.87,553.67) 1(1890.87,555.67) 1(1892.87,559.67) 1(1894.87,401.67) 1(1894.87,561.67) 1(1894.87,563.67) 1(1940.87,547.67) 1(1948.87,565.67) 1(1970.87,577.67) 1(1976.87,505.67) 1(1976.87,571.67) 1(1978.87,549.67) 1(1980.87,551.67) 1(1980.87,583.67) 1(1982.87,553.67) 1(1984.87,555.67) 1(1984.87,579.67) 1(1986.87,577.67) 1(2002.87,459.67) 1(2004.87,461.67) 1(2004.87,523.67) 1(2006.87,465.67) 1(2008.87,561.67) 1(2010.87,527.67) 1(2012.87,555.67) 1(2018.87,491.67) 1(2018.87,533.67) 1(2020.87,535.67) 1(2022.87,537.67) 1(2024.87,539.67) 1(2026.87,541.67) 1(2028.87,529.67) 1(2028.87,543.67) 1(2030.87,545.67) 1(2032.87,547.67) 1(2034.87,549.67) 1(2040.87,519.67) 1(2044.87,383.67) 1(2046.87,461.67) 1(2062.87,383.67)
  rect 10x2 on Top Overlay: 1(1765.87,399.67) 1(1767.87,401.67) 1(1769.87,403.67) 1(1769.87,525.67) 1(1771.87,405.67) 1(1771.87,527.67) 1(1773.87,407.67) 1(1775.87,409.67) 1(1775.87,529.67) 1(1777.87,411.67) 1(1779.87,531.67) 1(1781.87,417.67) 1(1781.87,533.67) 1(1783.87,419.67) 1(1785.87,535.67) 1(1787.87,537.67) 1(1789.87,539.67) 1(1791.87,541.67) 1(1793.87,543.67) 1(1799.87,549.67) 1(1801.87,551.67) 1(1803.87,459.67) 1(1803.87,553.67) 1(1805.87,557.67) 1(1807.87,543.67) 1(1807.87,559.67) 1(1809.87,563.67) 1(1813.87,539.67) 1(1815.87,537.67) 1(1817.87,535.67) 1(1819.87,531.67) 1(1819.87,533.67) 1(1827.87,359.67) 1(1833.87,503.67) 1(1855.87,519.67) 1(1859.87,521.67) 1(1861.87,457.67) 1(1861.87,523.67) 1(1863.87,455.67) 1(1865.87,453.67) 1(1865.87,525.67) 1(1867.87,527.67) 1(1869.87,529.67) 1(1871.87,577.67) 1(1873.87,573.67) 1(1873.87,575.67) 1(1891.87,557.67) 1(1895.87,403.67) 1(1895.87,565.67) 1(1925.87,439.67) 1(1927.87,441.67) 1(1929.87,357.67) 1(1929.87,557.67) 1(1937.87,551.67) 1(1939.87,549.67) 1(1939.87,573.67) 1(1941.87,521.67) 1(1945.87,569.67) 1(1947.87,567.67) 1(1955.87,411.67) 1(1963.87,537.67) 1(1965.87,539.67) 1(1969.87,541.67) 1(1971.87,543.67) 1(1973.87,545.67) 1(1973.87,575.67) 1(1975.87,547.67) 1(1975.87,573.67) 1(1995.87,419.67) 1(1997.87,429.67) 1(1997.87,431.67) 1(1997.87,433.67) 1(1997.87,435.67) 1(1997.87,437.67) 1(1997.87,439.67) 1(1997.87,441.67) 1(2005.87,463.67) 1(2007.87,467.67) 1(2007.87,525.67) 1(2009.87,469.67) 1(2013.87,529.67) 1(2015.87,531.67) 1(2029.87,407.67) 1(2031.87,527.67) 1(2039.87,579.67) 1(2043.87,575.67) 1(2045.87,385.67) 1(2063.87,377.67) 1(2063.87,379.67) 1(2063.87,381.67)
  rect 4x2 on Top Overlay: 1(1766.87,523.67) 1(1774.87,569.67) 1(1800.87,463.67) 1(1810.87,571.67) 1(1848.87,539.67) 1(1924.87,437.67) 1(1934.87,529.67) 1(1934.87,531.67) 1(1952.87,409.67) 1(1968.87,579.67) 1(1978.87,567.67) 1(1990.87,563.67) 1(2006.87,563.67) 1(2040.87,517.67) 1(2044.87,381.67)
  rect 12x2 on Top Overlay: 1(1778.87,413.67) 1(1780.87,415.67) 1(1784.87,421.67) 1(1786.87,423.67) 1(1788.87,425.67) 1(1788.87,427.67) 1(1790.87,429.67) 1(1792.87,433.67) 1(1794.87,435.67) 1(1796.87,439.67) 1(1810.87,541.67) 1(1812.87,565.67) 1(1834.87,377.67) 1(1834.87,379.67) 1(1834.87,381.67) 1(1834.87,383.67) 1(1834.87,385.67) 1(1834.87,387.67) 1(1834.87,389.67) 1(1834.87,391.67) 1(1834.87,393.67) 1(1834.87,395.67) 1(1834.87,397.67) 1(1834.87,399.67) 1(1834.87,401.67) 1(1834.87,403.67) 1(1834.87,405.67) 1(1834.87,407.67) 1(1834.87,409.67) 1(1834.87,411.67) 1(1834.87,413.67) 1(1834.87,415.67) 1(1834.87,417.67) 1(1834.87,419.67) 1(1834.87,421.67) 1(1834.87,423.67) 1(1834.87,425.67) 1(1834.87,427.67) 1(1834.87,429.67) 1(1834.87,431.67) 1(1834.87,433.67) 1(1834.87,435.67) 1(1834.87,437.67) 1(1834.87,439.67) 1(1834.87,441.67) 1(1834.87,443.67) 1(1834.87,445.67) 1(1834.87,447.67) 1(1834.87,449.67) 1(1834.87,451.67) 1(1834.87,453.67) 1(1834.87,455.67) 1(1834.87,457.67) 1(1834.87,459.67) 1(1834.87,461.67) 1(1834.87,463.67) 1(1834.87,465.67) 1(1834.87,467.67) 1(1834.87,469.67) 1(1834.87,471.67) 1(1834.87,473.67) 1(1834.87,475.67) 1(1834.87,477.67) 1(1834.87,479.67) 1(1834.87,481.67) 1(1834.87,483.67) 1(1834.87,485.67) 1(1834.87,487.67) 1(1834.87,489.67) 1(1834.87,491.67) 1(1834.87,493.67) 1(1866.87,451.67) 1(1868.87,449.67) 1(1870.87,447.67) 1(1884.87,543.67) 1(1884.87,545.67) 1(1894.87,405.67) 1(1930.87,443.67) 1(1932.87,445.67) 1(1936.87,553.67) 1(1940.87,451.67) 1(1952.87,463.67) 1(1952.87,529.67) 1(1954.87,531.67) 1(1956.87,413.67) 1(1956.87,415.67) 1(1956.87,417.67) 1(1956.87,419.67) 1(1956.87,425.67) 1(1956.87,427.67) 1(1956.87,429.67) 1(1956.87,431.67) 1(1956.87,433.67) 1(1956.87,435.67) 1(1956.87,437.67) 1(1956.87,439.67) 1(1956.87,441.67) 1(1956.87,443.67) 1(1956.87,445.67) 1(1956.87,447.67) 1(1956.87,449.67) 1(1956.87,451.67) 1(1958.87,533.67) 1(1960.87,535.67) 1(1982.87,581.67) 1(1986.87,393.67) 1(1988.87,397.67) 1(1990.87,401.67) 1(1990.87,403.67) 1(1992.87,405.67) 1(1992.87,407.67) 1(1992.87,409.67) 1(1994.87,411.67) 1(1994.87,413.67) 1(1994.87,415.67) 1(1994.87,417.67) 1(1996.87,425.67) 1(1996.87,427.67) 1(1998.87,443.67) 1(1998.87,445.67) 1(1998.87,447.67) 1(1998.87,449.67) 1(1998.87,451.67) 1(2010.87,377.67) 1(2010.87,379.67) 1(2010.87,381.67) 1(2010.87,383.67) 1(2010.87,385.67) 1(2010.87,387.67) 1(2010.87,389.67) 1(2010.87,391.67) 1(2010.87,393.67) 1(2010.87,395.67) 1(2010.87,397.67) 1(2010.87,399.67) 1(2010.87,401.67) 1(2010.87,403.67) 1(2010.87,405.67) 1(2010.87,407.67) 1(2010.87,409.67) 1(2010.87,411.67) 1(2010.87,413.67) 1(2010.87,415.67) 1(2010.87,417.67) 1(2010.87,419.67) 1(2010.87,471.67) 1(2012.87,473.67) 1(2018.87,489.67) 1(2040.87,521.67) 1(2040.87,555.67) 1(2040.87,557.67) 1(2044.87,387.67) 1(2044.87,389.67) 1(2046.87,415.67) 1(2046.87,417.67) 1(2046.87,419.67) 1(2046.87,425.67) 1(2046.87,427.67) 1(2046.87,429.67) 1(2046.87,431.67) 1(2046.87,433.67) 1(2046.87,435.67) 1(2046.87,437.67) 1(2046.87,439.67) 1(2046.87,441.67) 1(2046.87,443.67) 1(2046.87,445.67) 1(2046.87,447.67) 1(2046.87,449.67) 1(2046.87,451.67) 1(2046.87,459.67) 1(2064.87,563.67)
  rect 6x2 on Top Overlay: 1(1781.87,561.67) 1(1821.87,527.67) 1(1831.87,505.67) 1(1849.87,541.67) 1(1851.87,543.67) 1(1853.87,545.67) 1(1855.87,547.67) 1(1857.87,461.67) 1(1859.87,551.67) 1(1865.87,559.67) 1(1869.87,579.67) 1(1895.87,399.67) 1(1895.87,571.67) 1(1941.87,519.67) 1(1949.87,563.67) 1(1975.87,507.67) 1(1977.87,569.67) 1(1985.87,557.67) 1(1987.87,559.67) 1(1987.87,575.67) 1(1989.87,561.67) 1(2027.87,409.67) 1(2043.87,413.67) 1(2043.87,527.67) 1(2043.87,529.67) 1(2043.87,531.67) 1(2043.87,533.67) 1(2043.87,535.67) 1(2043.87,537.67) 1(2043.87,539.67) 1(2043.87,541.67) 1(2043.87,543.67) 1(2043.87,545.67) 1(2043.87,547.67) 1(2043.87,549.67) 1(2043.87,563.67) 1(2043.87,565.67) 1(2043.87,567.67) 1(2043.87,569.67) 1(2043.87,571.67) 1(2043.87,573.67) 1(2045.87,463.67) 1(2063.87,385.67) 1(2063.87,387.67) 1(2063.87,389.67) 1(2063.87,391.67) 1(2063.87,393.67) 1(2063.87,395.67) 1(2063.87,397.67) 1(2063.87,399.67) 1(2063.87,401.67)
  rect 16x2 on Top Overlay: 1(1782.87,563.67) 1(1798.87,443.67) 1(1800.87,447.67) 1(1802.87,449.67) 1(1808.87,569.67) 1(1810.87,375.67) 1(1828.87,363.67) 1(1836.87,497.67) 1(1872.87,565.67) 1(1876.87,441.67) 1(1878.87,439.67) 1(1880.87,437.67) 1(1882.87,435.67) 1(1882.87,539.67) 1(1882.87,547.67) 1(1884.87,431.67) 1(1884.87,541.67) 1(1894.87,409.67) 1(1894.87,411.67) 1(1894.87,413.67) 1(1942.87,523.67) 1(1966.87,373.67) 1(1970.87,375.67) 1(1970.87,489.67) 1(1972.87,377.67) 1(1972.87,491.67) 1(1974.87,379.67) 1(1974.87,493.67) 1(1978.87,501.67) 1(2012.87,373.67) 1(2014.87,371.67) 1(2018.87,487.67) 1(2036.87,401.67) 1(2038.87,399.67) 1(2038.87,525.67) 1(2038.87,551.67) 1(2040.87,397.67) 1(2042.87,393.67) 1(2042.87,395.67) 1(2064.87,373.67)
  rect 30x2 on Top Overlay: 1(1789.87,565.67) 1(1825.87,369.67)
  rect 14x2 on Top Overlay: 1(1791.87,431.67) 1(1795.87,437.67) 1(1797.87,441.67) 1(1799.87,445.67) 1(1799.87,547.67) 1(1803.87,457.67) 1(1827.87,361.67) 1(1833.87,375.67) 1(1835.87,495.67) 1(1835.87,501.67) 1(1873.87,445.67) 1(1873.87,551.67) 1(1875.87,443.67) 1(1895.87,407.67) 1(1931.87,555.67) 1(1935.87,447.67) 1(1937.87,449.67) 1(1941.87,571.67) 1(1951.87,461.67) 1(1953.87,465.67) 1(1955.87,467.67) 1(1957.87,469.67) 1(1959.87,471.67) 1(1959.87,473.67) 1(1961.87,475.67) 1(1963.87,477.67) 1(1963.87,479.67) 1(1965.87,481.67) 1(1969.87,487.67) 1(1977.87,381.67) 1(1977.87,503.67) 1(1979.87,383.67) 1(1981.87,385.67) 1(1981.87,387.67) 1(1983.87,389.67) 1(1985.87,391.67) 1(1987.87,395.67) 1(1989.87,399.67) 1(2011.87,375.67) 1(2013.87,475.67) 1(2015.87,477.67) 1(2031.87,405.67) 1(2033.87,403.67) 1(2039.87,523.67) 1(2039.87,553.67) 1(2041.87,577.67) 1(2043.87,391.67) 1(2063.87,375.67)
  rect 44x2 on Top Overlay: 1(1794.87,567.67)
  rect 20x2 on Top Overlay: 1(1800.87,545.67) 1(1804.87,451.67) 1(1804.87,453.67) 1(1866.87,553.67) 1(1880.87,549.67) 1(1938.87,361.67) 1(1942.87,525.67) 1(1944.87,363.67) 1(1950.87,365.67) 1(1978.87,499.67) 1(2020.87,481.67) 1(2064.87,371.67)
  rect 18x2 on Top Overlay: 1(1805.87,455.67) 1(1837.87,499.67) 1(1883.87,433.67) 1(1885.87,429.67) 1(1887.87,427.67) 1(1889.87,423.67) 1(1889.87,425.67) 1(1891.87,419.67) 1(1891.87,421.67) 1(1893.87,415.67) 1(1893.87,417.67) 1(1933.87,359.67) 1(1951.87,459.67) 1(1955.87,367.67) 1(1959.87,369.67) 1(1963.87,371.67) 1(1975.87,495.67) 1(1977.87,497.67) 1(2017.87,479.67)
  rect 38x2 on Top Overlay: 1(1821.87,373.67)
  rect 36x2 on Top Overlay: 1(1822.87,371.67) 1(1884.87,567.67)
  rect 24x2 on Top Overlay: 1(1826.87,367.67) 1(1890.87,569.67) 1(1944.87,527.67) 1(2018.87,557.67)
  rect 22x2 on Top Overlay: 1(1827.87,365.67)
  rect 2x2 on Top Overlay: 1(1851.87,515.67) 1(1857.87,463.67) 1(1987.87,573.67) 1(2003.87,521.67) 1(2017.87,493.67) 1(2027.87,531.67)
  rect 68x2 on Top Overlay: 1(1994.87,485.67) 1(2040.87,369.67)
  rect 118x2 on Top Overlay: 1(1995.87,453.67) 1(1997.87,455.67)
  rect 70x2 on Top Overlay: 1(1995.87,483.67) 1(2039.87,559.67)
  rect 116x2 on Top Overlay: 1(1998.87,457.67)
  rect 102x2 on Top Overlay: 1(2001.87,421.67) 1(2001.87,423.67)
  rect 54x2 on Top Overlay: 1(2039.87,361.67)
  rect 58x2 on Top Overlay: 1(2039.87,363.67)
  rect 66x2 on Top Overlay: 1(2039.87,367.67)
  rect 64x2 on Top Overlay: 1(2040.87,365.67)
  rect 50x2 on Top Overlay: 1(2047.87,561.67)
  rect 98x2 on Bottom Overlay: 1(2282.54,479.76) 1(2282.54,481.76) 1(2282.54,483.76) 1(2372.54,573.76)
  rect 100x2 on Bottom Overlay: 1(2283.54,469.76) 1(2283.54,471.76) 1(2283.54,473.76) 1(2283.54,475.76) 1(2283.54,477.76) 1(2283.54,485.76) 1(2283.54,487.76) 1(2283.54,489.76) 1(2283.54,491.76) 1(2283.54,493.76) 1(2287.54,501.76) 1(2457.54,501.76) 1(2461.54,471.76) 1(2461.54,473.76) 1(2461.54,475.76) 1(2461.54,477.76) 1(2461.54,479.76) 1(2461.54,481.76) 1(2461.54,483.76) 1(2461.54,485.76) 1(2461.54,487.76) 1(2461.54,489.76) 1(2461.54,491.76) 1(2461.54,493.76)
  rect 102x2 on Bottom Overlay: 1(2284.54,465.76) 1(2284.54,467.76) 1(2284.54,495.76) 1(2284.54,497.76) 1(2284.54,499.76) 1(2286.54,463.76) 1(2458.54,463.76) 1(2460.54,465.76) 1(2460.54,467.76) 1(2460.54,469.76) 1(2460.54,495.76) 1(2460.54,497.76)
  rect 4x2 on Bottom Overlay: 1(2287.54,591.76) 1(2329.54,385.76) 1(2415.54,385.76) 1(2457.54,591.76)
  rect 6x2 on Bottom Overlay: 1(2288.54,373.76) 1(2456.54,373.76)
  rect 10x2 on Bottom Overlay: 1(2288.54,375.76) 1(2288.54,589.76) 1(2328.54,387.76) 1(2416.54,387.76) 1(2456.54,375.76) 1(2456.54,589.76)
  rect 14x2 on Bottom Overlay: 1(2288.54,377.76) 1(2288.54,587.76) 1(2326.54,389.76) 1(2418.54,389.76) 1(2456.54,587.76)
  rect 18x2 on Bottom Overlay: 1(2288.54,585.76)
  rect 20x2 on Bottom Overlay: 1(2289.54,379.76) 1(2455.54,379.76) 1(2455.54,585.76)
  rect 24x2 on Bottom Overlay: 1(2289.54,381.76) 1(2289.54,583.76) 1(2455.54,583.76)
  rect 28x2 on Bottom Overlay: 1(2289.54,581.76)
  rect 30x2 on Bottom Overlay: 1(2290.54,383.76) 1(2454.54,383.76) 1(2454.54,581.76)
  rect 34x2 on Bottom Overlay: 1(2290.54,385.76) 1(2290.54,579.76) 1(2372.54,621.76) 1(2454.54,385.76) 1(2454.54,579.76)
  rect 38x2 on Bottom Overlay: 1(2290.54,577.76) 1(2372.54,615.76) 1(2372.54,617.76) 1(2372.54,619.76) 1(2454.54,577.76)
  rect 40x2 on Bottom Overlay: 1(2291.54,387.76) 1(2371.54,613.76) 1(2453.54,387.76)
  rect 44x2 on Bottom Overlay: 1(2291.54,389.76) 1(2291.54,575.76) 1(2371.54,601.76) 1(2453.54,389.76) 1(2453.54,575.76)
  rect 92x2 on Bottom Overlay: 1(2291.54,461.76) 1(2321.54,521.76) 1(2453.54,461.76)
  rect 48x2 on Bottom Overlay: 1(2291.54,573.76) 1(2371.54,591.76) 1(2453.54,573.76)
  rect 90x2 on Bottom Overlay: 1(2292.54,503.76) 1(2422.54,521.76) 1(2450.54,503.76)
  rect 84x2 on Bottom Overlay: 1(2297.54,459.76) 1(2317.54,519.76) 1(2427.54,519.76) 1(2447.54,459.76)
  rect 72x2 on Bottom Overlay: 1(2299.54,395.76) 1(2303.54,405.76) 1(2305.54,409.76) 1(2305.54,455.76) 1(2305.54,507.76) 1(2307.54,453.76) 1(2307.54,509.76) 1(2315.54,431.76) 1(2315.54,433.76) 1(2429.54,431.76) 1(2429.54,433.76) 1(2435.54,511.76) 1(2437.54,411.76) 1(2437.54,453.76) 1(2437.54,455.76) 1(2437.54,509.76) 1(2439.54,407.76) 1(2439.54,409.76) 1(2439.54,507.76) 1(2441.54,405.76) 1(2445.54,395.76)
  rect 76x2 on Bottom Overlay: 1(2299.54,397.76) 1(2311.54,449.76) 1(2311.54,515.76) 1(2315.54,437.76) 1(2315.54,439.76) 1(2429.54,437.76) 1(2429.54,439.76) 1(2433.54,449.76) 1(2433.54,515.76) 1(2435.54,451.76) 1(2445.54,397.76)
  rect 80x2 on Bottom Overlay: 1(2299.54,505.76) 1(2313.54,445.76) 1(2315.54,441.76) 1(2315.54,443.76) 1(2429.54,441.76) 1(2429.54,443.76) 1(2429.54,445.76) 1(2445.54,505.76)
  rect 66x2 on Bottom Overlay: 1(2300.54,391.76) 1(2314.54,425.76)
  rect 70x2 on Bottom Overlay: 1(2300.54,393.76) 1(2306.54,411.76) 1(2308.54,413.76) 1(2308.54,415.76) 1(2310.54,417.76) 1(2312.54,421.76) 1(2432.54,421.76) 1(2434.54,417.76) 1(2436.54,413.76) 1(2436.54,415.76) 1(2444.54,393.76)
  rect 74x2 on Bottom Overlay: 1(2300.54,399.76) 1(2300.54,401.76) 1(2302.54,403.76) 1(2304.54,407.76) 1(2304.54,457.76) 1(2308.54,451.76) 1(2308.54,511.76) 1(2310.54,513.76) 1(2314.54,435.76) 1(2428.54,435.76) 1(2434.54,513.76) 1(2440.54,457.76) 1(2442.54,401.76) 1(2442.54,403.76) 1(2444.54,399.76)
  rect 68x2 on Bottom Overlay: 1(2311.54,419.76) 1(2313.54,423.76) 1(2315.54,427.76) 1(2315.54,429.76) 1(2371.54,579.76) 1(2429.54,425.76) 1(2429.54,427.76) 1(2429.54,429.76) 1(2431.54,423.76) 1(2433.54,419.76) 1(2443.54,391.76)
  rect 78x2 on Bottom Overlay: 1(2312.54,447.76) 1(2314.54,517.76) 1(2372.54,577.76) 1(2430.54,517.76) 1(2432.54,447.76)
  rect 184x2 on Bottom Overlay: 1(2371.54,539.76)
  rect 192x2 on Bottom Overlay: 1(2371.54,545.76)
  rect 200x2 on Bottom Overlay: 1(2371.54,551.76)
  rect 190x2 on Bottom Overlay: 1(2372.54,523.76) 1(2372.54,525.76) 1(2372.54,543.76)
  rect 186x2 on Bottom Overlay: 1(2372.54,527.76) 1(2372.54,529.76) 1(2372.54,541.76)
  rect 182x2 on Bottom Overlay: 1(2372.54,531.76) 1(2372.54,533.76) 1(2372.54,535.76) 1(2372.54,537.76)
  rect 194x2 on Bottom Overlay: 1(2372.54,547.76)
  rect 198x2 on Bottom Overlay: 1(2372.54,549.76)
  rect 202x2 on Bottom Overlay: 1(2372.54,553.76)
  rect 206x2 on Bottom Overlay: 1(2372.54,555.76)
  rect 210x2 on Bottom Overlay: 1(2372.54,557.76) 1(2372.54,559.76)
  rect 214x2 on Bottom Overlay: 1(2372.54,561.76) 1(2372.54,571.76)
  rect 218x2 on Bottom Overlay: 1(2372.54,563.76) 1(2372.54,565.76) 1(2372.54,569.76)
  rect 222x2 on Bottom Overlay: 1(2372.54,567.76)
  rect 86x2 on Bottom Overlay: 1(2372.54,575.76)
  rect 58x2 on Bottom Overlay: 1(2372.54,581.76)
  rect 50x2 on Bottom Overlay: 1(2372.54,583.76) 1(2372.54,585.76) 1(2372.54,587.76) 1(2372.54,589.76)
  rect 46x2 on Bottom Overlay: 1(2372.54,593.76) 1(2372.54,595.76) 1(2372.54,597.76) 1(2372.54,599.76)
  rect 42x2 on Bottom Overlay: 1(2372.54,603.76) 1(2372.54,605.76) 1(2372.54,607.76) 1(2372.54,609.76) 1(2372.54,611.76)
  rect 26x2 on Bottom Overlay: 1(2454.54,381.76)
  rect 16x2 on Bottom Overlay: 1(2455.54,377.76)
  rect 104x2 on Bottom Overlay: 1(2459.54,499.76)

## Via types
v1: diameter 20, hole 10, Top Layer to Bottom Layer, tented both sides, 179 vias
v2: diameter 30, hole 15, Top Layer to Bottom Layer, tented both sides, 129 vias
v3: diameter 25.98, hole 12.99, Top Layer to Bottom Layer, tented top, 10 vias